# Altium PCB PCB1.PcbDoc
Units mil, origin at the board's own origin, x right, y up, seen from the top; angles counter-clockwise.
Board outline 1980 x 1920 mil, 2 copper layers (Top Layer, Bottom Layer); 32 components, 21 nets, 80 pads, 22 vias.
Unrouted connection lines stored in the file: 1.
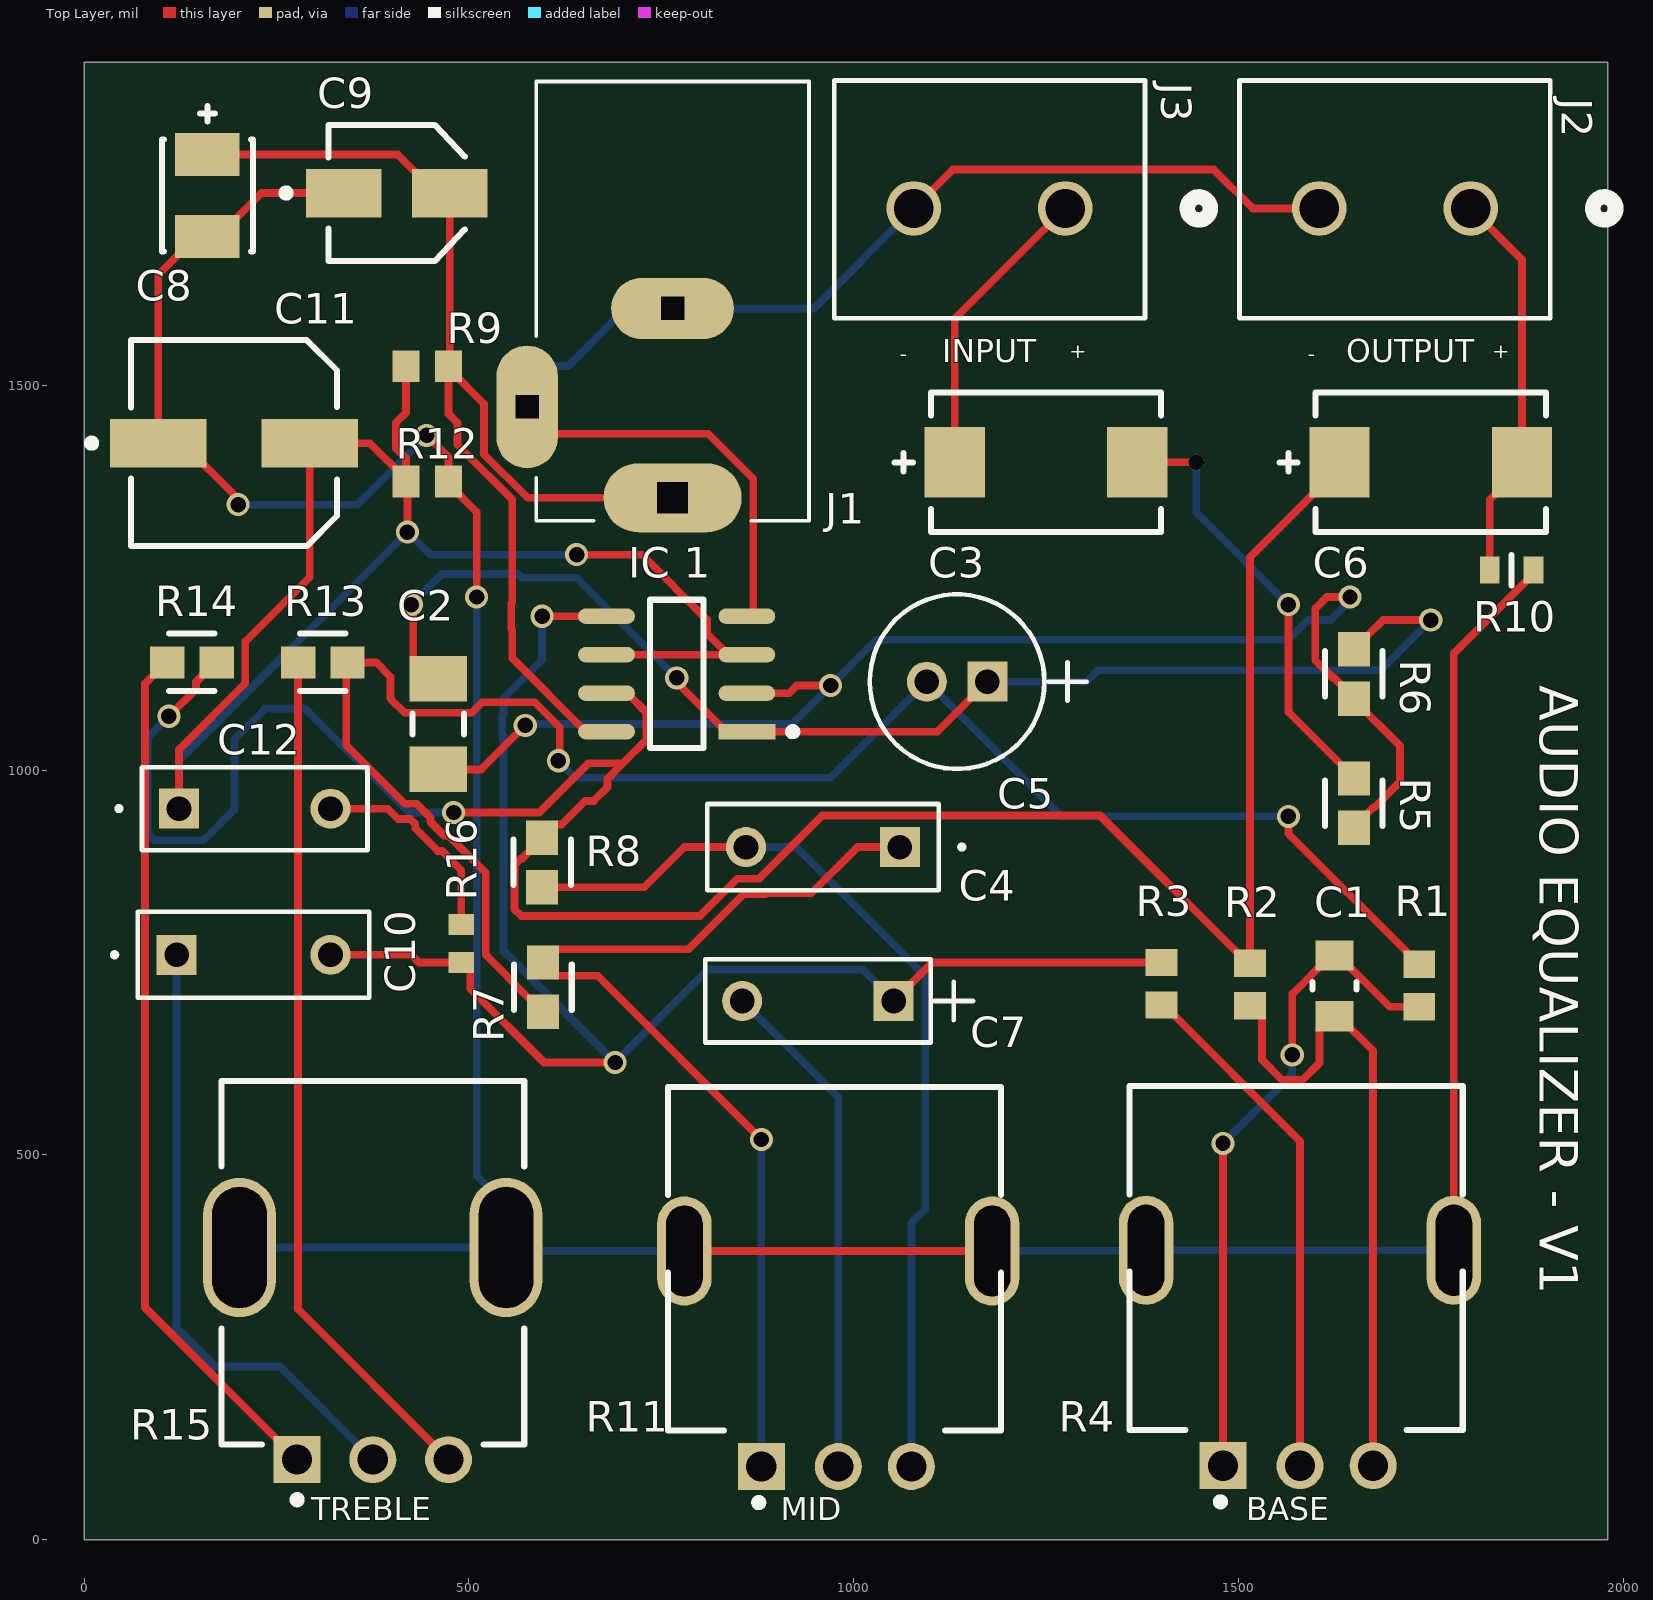
[diagram p0: Top Layer view]
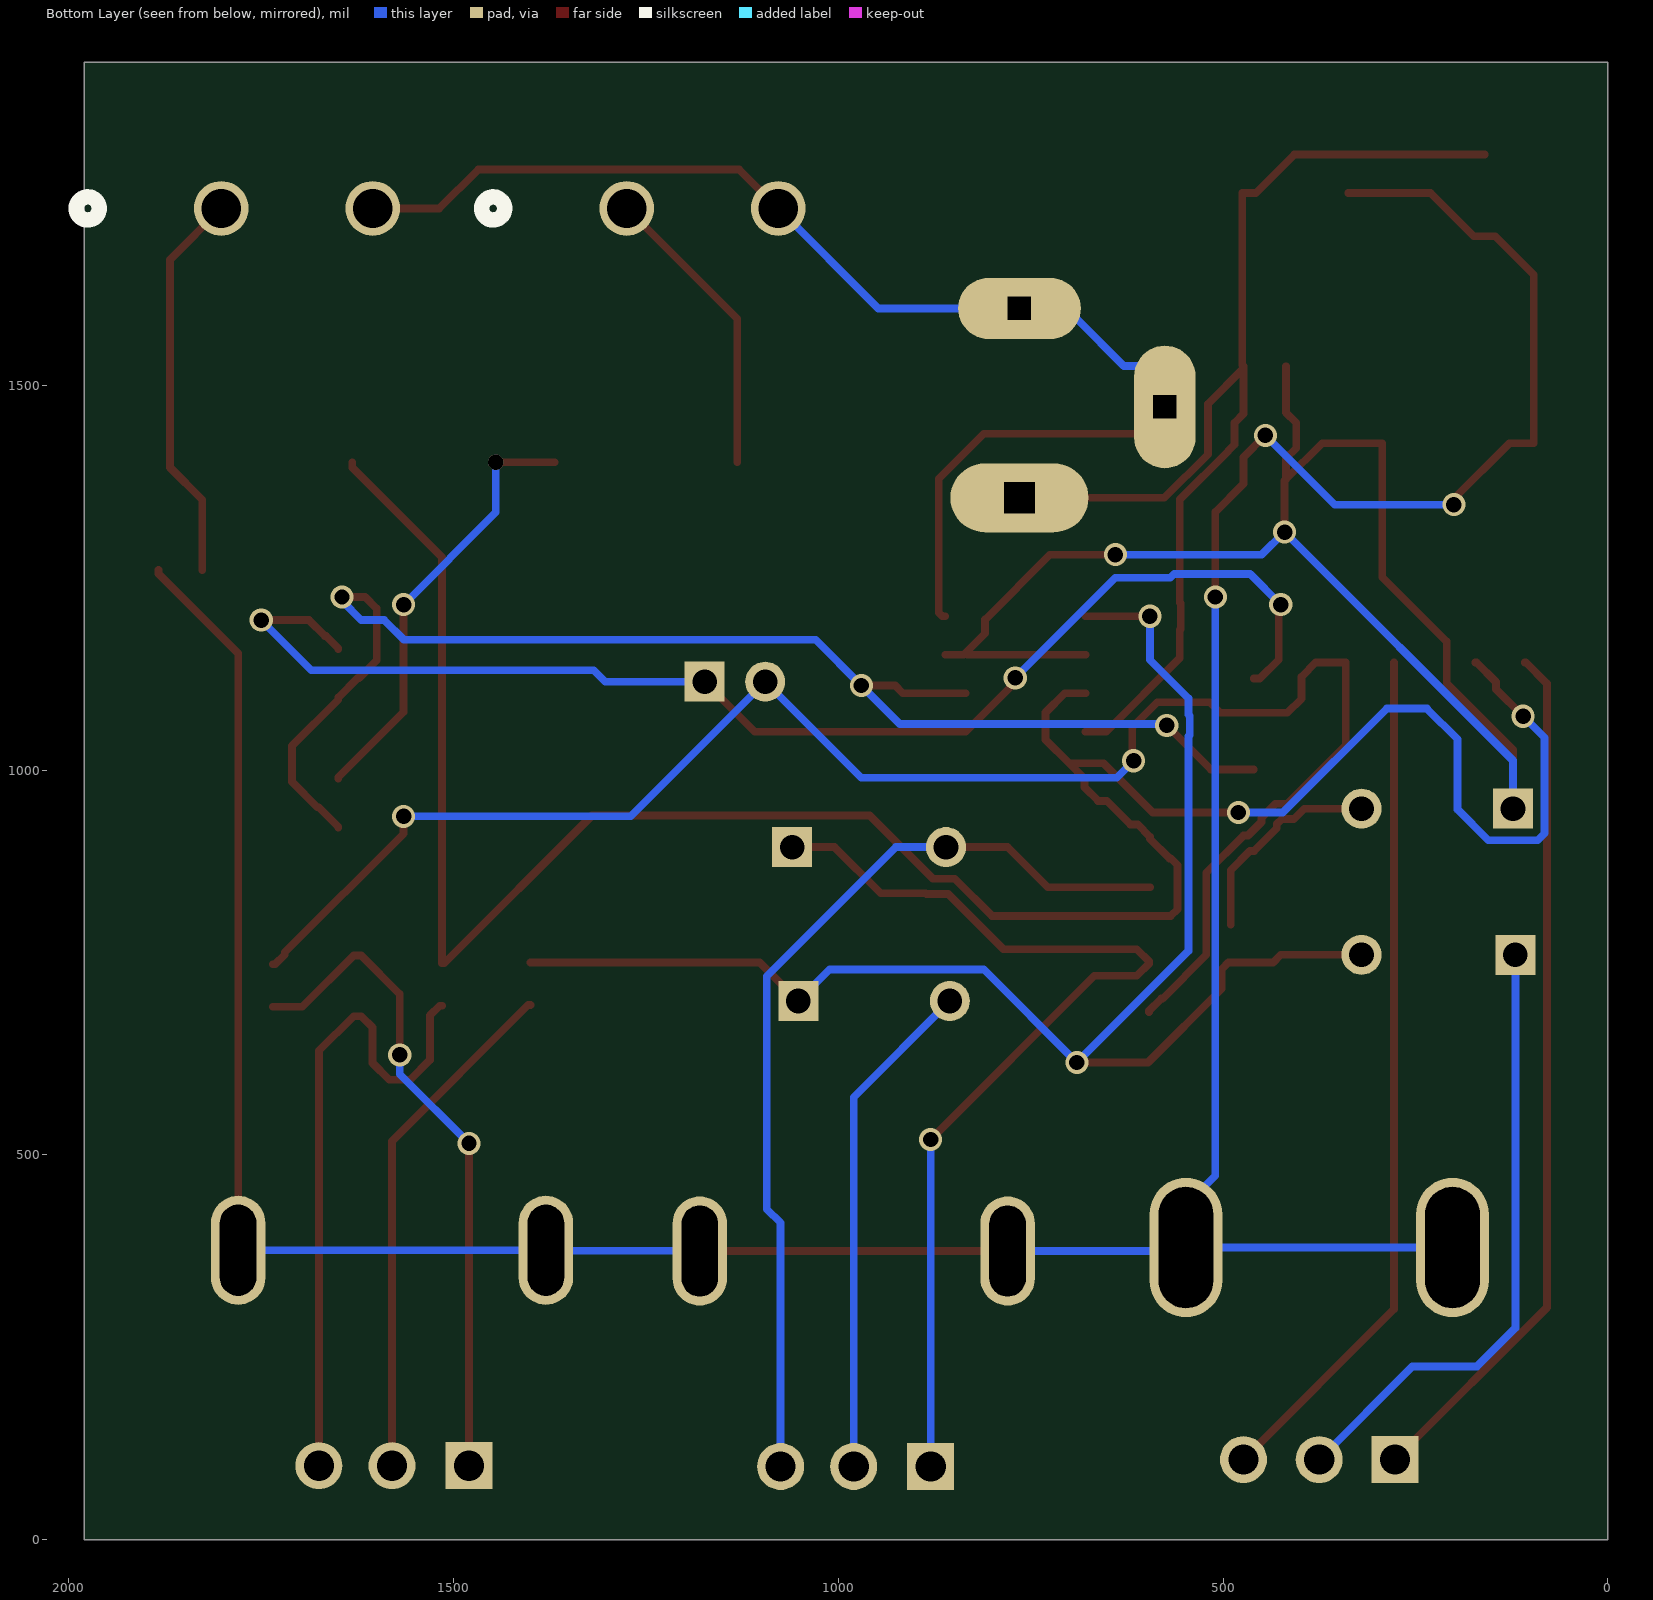
[diagram p1: Bottom Layer view, seen from below]
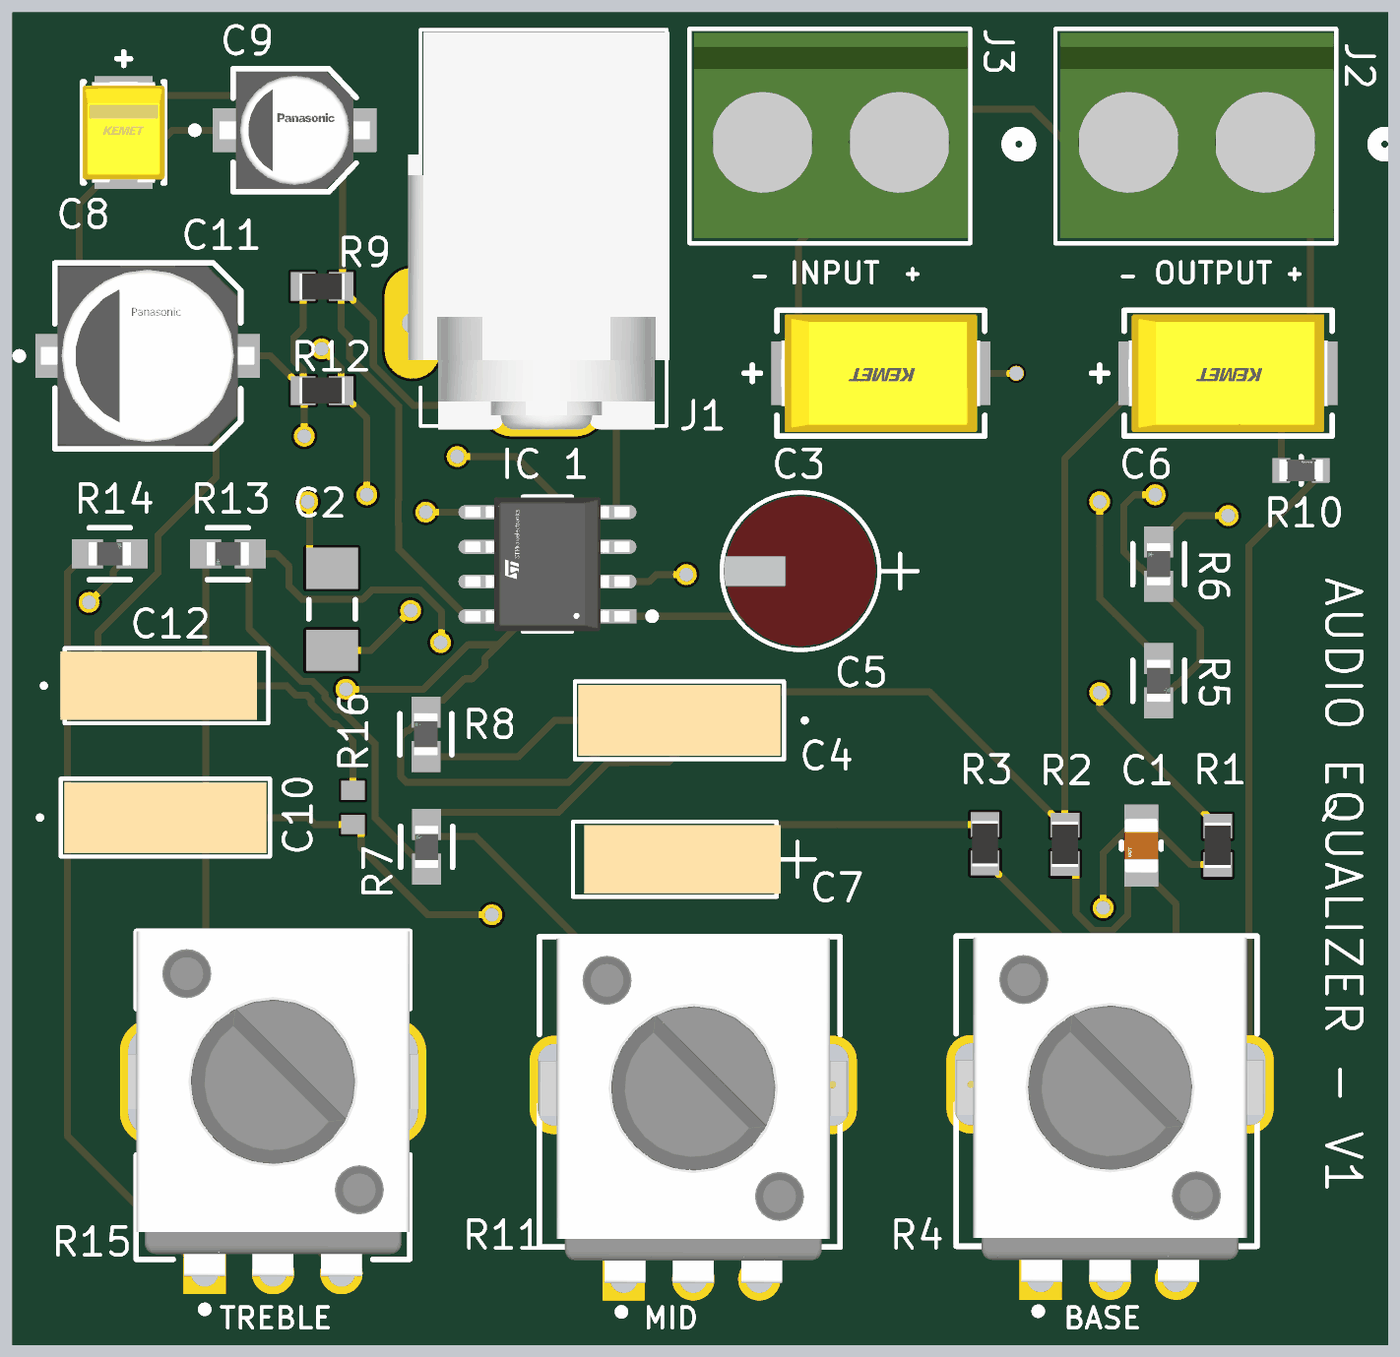
[diagram p2: 3D render of the assembled board from above, using the file's embedded part models]

## Layer stack, top to bottom
Top Solder: solder mask 0.4, Solder Resist, Dk 3.5
Top Layer: signal copper 1.4
Dielectric 1: dielectric 12.6, FR-4, Dk 4.8
Bottom Layer: signal copper 1.4
Bottom Solder: solder mask 0.4, Solder Resist, Dk 3.5

## Board outline
0,0 0,1920 1980,1920 1980,0

## Design rules (kind name [scope] priority, off if disabled: settings)
Clearance [All] p1: gap=10 ignorepadtopadclearanceinfootprint=FALSE
HoleSize [All] p1: absolutevalues=TRUE maxlimit=700 minlimit=1 maxpercent=80.000 minpercent=20.000
PolygonConnect [All] p1: connectstyle=Relief reliefconductorwidth=10 reliefentries=4 polygonreliefangle="90 Angle" airgapwidth=10
RoutingVias [All] p1: holewidth=28 width=50 viastyle="Through Hole" minholewidth=5 minwidth=1 maxholewidth=50 maxwidth=50
SolderMaskExpansion [All] p1: expansion=4 istentingtop=FALSE
Width [All] p1: maxlimit=10 minlimit=10 preferedwidth=10
29 further rules are at their usual default settings.

## Components (designator, comment, footprint, x,y, rotation, side; value= is the part's Value field where it differs from the comment)
C1 "47nF" FP-0805-L_2_01_0_2-W_1_25-MFG 1625,719.68 r270 top
C2 "33pF" CAPC3216X94X50ML20T25 460,1060 r90 top
C3 "10uF 25v" FP-T491D-MFG 1250,1400 r180 top
C4 "4.7nF 63v" CAP_R82E-7P4X2P6-5P0_KEM 1060,900 r180 top
C5 "2.2u 63v" CAP_WCAP-ATG8_5x11_WRE 1173.74,1115 r180 top
C6 "10uf 25v" FP-T491D-MFG 1750,1400 r180 top
C7 "22n 63v" CAP_R82_2.5X6.5X7.2_ATN 1052,700 r180 top
C8 "0.1uF 35v" FP-T491B105K035AT-MFG 160,1746.85 r90 top
C9 "10uF 35v" FP-FKB-MFG 406.1,1750 r0 top
C10 "4.7nF 63v" CAP_R82E-7P4X2P6-5P0_KEM 120,760 r0 top
C11 "100uF 35v" FP-FTD-MFG 194.64,1425 r0 top
C12 "1.2n 100v" CAP_PHE_426_DJ_4100-5150_KEM 123.15,950 r0 top
"IC 1" "TL072CD" FP-SO8-IPC_C 770,1125 r180 top
J1 "RAPC732X" SWITCHCRAFT_RAPC732X 764.56,1600 r180 top (schematic designator J?)
J2 "691137710002" CONN2_710002_WRE 1801.85,1730 r180 top
J3 "691137710002" CONN2_710002_WRE 1275,1730 r180 top
R1 "10k" RESC1609X50X30ML8T20 1735,720 r270 top
R2 "10k" RESC1609X50X30ML8T20 1515,721.5 r90 top
R3 "10k" RESC1609X50X30ML8T20 1400,722.44 r90 top
R4 "P0915N-FC15BR100K" BI_Technologies_0_MFG 1575,366 r0 top
R5 "47k" FP-CRCW0603-e3-IPC_A 1650,957.1 r270 top
R6 "47k" FP-CRCW0603-e3-IPC_A 1650,1125 r90 top
R7 "3.3k" FP-CRCW0603-e3-IPC_A 596.16,717.9 r90 top
R8 "3.3k" FP-CRCW0603-e3-IPC_A 595,880 r90 top
R9 "10k" RESC1609X50X30ML8T20 445.79,1525 r0 top
R10 "22k" FP-ERA3A-MFG 1855,1260 r0 top
R11 "P0915N-FC15BR100K" BI_Technologies_0_MFG 975,365 r0 top
R12 "10k" RESC1609X50X30ML8T20 445.79,1375 r180 top
R13 "1.8k" FP-CRCW0603-e3-IPC_A 310,1140 r180 top
R14 "1.8k" FP-CRCW0603-e3-IPC_A 140,1140 r0 top
R15 "PTV09A-4020F-A504" Bourns_0_MFG 375,379.59 r0 top
R16 "270" RESC1608X55X30LL15T15 490,774.61 r270 top

## Footprints (in the part's own frame and the unit in brackets; to place one, negate y for a bottom-side part, rotate by r counter-clockwise, add the part's x,y. Pads: shape width x height; smd on the part's side, far side on the other; paste and mask are expansions set on the pad)
BI_Technologies_0_MFG [mm]
  rect 1.55x1.55 hole 1 paste-2539.97 mask+0: 1(-2.413,-6.858)
  round 1.55 hole 1 paste-2539.97 mask+0: 2(0.127,-6.858) 3(2.54,-6.858)
  rrect100% 1.8x3.6 hole 1.2 slot 3 at 90 deg paste-2539.97 mask+0: 4(-4.953,0.254) 5(5.207,0.254)
  silkscreen extent -5.5,-8.17 5.5,5.68, body extent -5.57,-7.75 5.83,5.73, height 0.25
Bourns_0_MFG [mm]
  rect 1.55x1.55 hole 1 paste-2539.97 mask+0: 1(-2.5,-7)
  round 1.55 hole 1 paste-2539.97 mask+0: 2(0,-7) 3(2.5,-7)
  rrect100% 2.4x4.6 hole 4 slot 1.8 at 0 deg paste-2539.97 mask+0: 4(-4.4,0) 5(4.4,0)
  silkscreen extent -5,-8.45 5,5.5, body extent -5.7,-7.88 5.7,5.6, height 0.25
CAP_PHE_426_DJ_4100-5150_KEM [mil]
  rect 52x52 / inner round 60 / far side rect 52x52 hole 32 paste-99999 mask+0: 1(0,0)
  round 52 / inner round 60 / far side round 52 hole 32 paste-99999 mask+0: 2(196.85,0)
  silkscreen extent -81,-54 245,54, body extent -54,-49 229,49, height 256
CAP_R82_2.5X6.5X7.2_ATN [mil]
  rect 52x52 / inner round 60 / far side rect 52x52 hole 32 paste-99999 mask+0: 1(0,0)
  round 52 / inner round 60 / far side round 52 hole 32 paste-99999 mask+0: 2(197,0)
  silkscreen extent -103,-54 245,54, body extent -54,-49 229,49, height 256
CAP_R82E-7P4X2P6-5P0_KEM [mil]
  rect 52x52 / inner round 60 / far side rect 52x52 hole 32 paste-99999 mask+0: 1(0,0)
  round 52 / inner round 60 / far side round 52 hole 32 paste-99999 mask+0: 2(200,0)
  silkscreen extent -84,-56 250,56, body extent -46,-51 246,51, height 260
CAP_WCAP-ATG8_5x11_WRE [mil]
  rect 52x52 / inner round 60 / far side rect 52x52 hole 32 paste-99999 mask+0: 1(0,0)
  round 52 / inner round 60 / far side round 52 hole 32 paste-99999 mask+0: 2(78.74,0)
  silkscreen extent -129,-113 153,113, body extent -69,-108 149,108, height 483
CAPC3216X94X50ML20T25 [mm] "Chip Capacitor, 2-Leads, Body 3.20x1.60mm, IPC Low Density"
  rect 1.5x1.9 smd: 1(-1.5,0) 2(1.5,0)
  silkscreen extent -0.35,-0.85 0.35,0.85, body extent -1.7,-0.9 1.7,0.9, height 0.94
CONN2_710002_WRE [mil]
  round 71 / inner round 60 / far side round 71 hole 51 paste-99999 mask+0: 1(0,0) 2(196.85,0)
  silkscreen extent -189,-166 300,143, body extent -100,-160 294,135, height 453
FP-0805-L_2_01_0_2-W_1_25-MFG [mm]
  rect 1x1.25 smd paste+0 mask+0: 1(-1,0) 2(1,0)
  silkscreen extent -0.13,-0.72 0.13,0.72, body extent -1.6,-0.82 1.6,0.82, height 0.25
FP-CRCW0603-e3-IPC_A [mil]
  rect 44.69x41.82 smd paste+0 mask+0: 1(-32.1,0) 2(32.1,0)
  silkscreen extent -30,-37 30,37, body extent -74,-41 74,41, height 10
FP-ERA3A-MFG [mm]
  rect 0.65x0.9 smd paste+0 mask+0: 1(-0.725,0) 2(0.725,0)
  silkscreen extent 0,-0.5 0,0.5, body extent -1.15,-0.6 1.15,0.6, height 0.25
FP-FKB-MFG [mm]
  rect 2.5x1.6 smd paste+0 mask+0: 1(-1.75,0) 2(1.75,0)
  silkscreen extent -3.77,-2.25 2.25,2.25, body extent -3.25,-2.5 3.25,2.5, height 0.25
FP-FTD-MFG [mm]
  rect 3.2x1.6 smd paste+0 mask+0: 1(-2.5,0) 2(2.5,0)
  silkscreen extent -4.82,-3.4 3.4,3.4, body extent -4.35,-3.65 4.35,3.65, height 0.25
FP-SO8-IPC_C [mil]
  rect 73.78x20.16 smd paste+0 mask+0: 1(-91.18,75)
  rrect100% 73.78x20.16 smd paste+0 mask+0: 2(-91.18,25) 3(-91.18,-25) 4(-91.18,-75) 5(91.18,-75) 6(91.18,-25) 7(91.18,25) 8(91.18,75)
  silkscreen extent -156,-96 35,96, body extent -132,-100 132,100, height 10
FP-T491B105K035AT-MFG [mm]
  rect 1.42x2.13 smd paste+0 mask+0: 1(-1.35,0) 2(1.35,0)
  silkscreen extent -1.85,-1.5 2.95,1.5, body extent -2.18,-1.62 2.18,1.62, height 0.25
FP-T491D-MFG [mm]
  rect 1.99x2.33 smd paste+0 mask+0: 1(-3.01,0) 2(3.01,0)
  silkscreen extent -3.8,-2.3 5,2.3, body extent -4.13,-2.42 4.13,2.42, height 0.25
RESC1608X55X30LL15T15 [mm] "Chip Resistor, 2-Leads, Body 1.60x0.80mm, IPC High Density"
  rect 0.7x0.85 smd: 1(-0.625,0) 2(0.625,0)
  body extent -0.87,-0.48 0.87,0.48, height 0.55
RESC1609X50X30ML8T20 [mm] "Chip Resistor, 2-Leads, Body 1.65x0.95mm, IPC Low Density"
  rect 0.9x1.05 smd: 1(-0.7,0) 2(0.7,0)
  body extent -0.82,-0.48 0.82,0.48, height 0.5
SWITCHCRAFT_RAPC732X [mm]
  oval 4.56x2.28 hole 1.02 square: PIN(0,6.25)
  oval 2.025x4.05 hole 0.76 square: SHUNT(4.8,3.25)
  oval 4.05x2.025 hole 0.76 square: SLEEVE(0,0)
  silkscreen extent -4.5,-7.49 4.5,7.01, body extent -4.6,-7.4 4.95,7.14, height 10.73

## Part data
C1: library part CMP-04427-003357-1, "General Purpose Ceramic Capacitor, 0805, 47nF, 10%, X8R, 15%, 50V", Case Code (Imperial)=0805, Case Code (Metric)=2012, Dielectric=X8R, Dielectric Material=Ceramic, Max Operating Temperature=150°C, Min Operating Temperature=-55°C, Tolerance=10%, Voltage=50V, Capacitance=47nF, Case/Package=0805, Construction=Flat, Depth=1.25mm, Height=0.94mm, Length=2.01mm, Mount="Surface Mount", Number of Pins=2, Packaging="Tape and Reel", Radiation Hardening=No, REACH SVHC="No SVHC", RoHS Compliant=Yes, Series=FlEXITERM, Termination=SMD/SMT, Voltage Rating=50V, Voltage Rating (DC)=50V
C2: library part CMP-1037-01149-2, "Chip Capacitor, 33 pF, +/- 5%, 100 V, -55 to 125 degC, 1206 (3216 Metric), RoHS, Tape and Reel", Case Size/Dimension=1206, Dielectric=C0G/NP0, Manufacturer=AVX, Package Description="2-Pin Surface Mount Device, Body 3.2 x 1.6 mm", Rated Voltage=100V, Tolerance (%)=±5%, Capacitance=33pF, Datasheet URL=http://datasheets.avx.com/C0GNP0-Dielectric.pdf, Datasheet Version=04/2016, Manufacturer URL=http://www.avx.com/, Mounting Technology=SurfaceMount, Package Reference=1206
C3 C6: library part CMP-2000-07200-2, "CAP TANT 10UF 10% 25V 2917", Capacitance=10uF, Case Code (Imperial)=2917, Case Code (Metric)=7343, Dielectric Material=Tantalum, ESR (Equivalent Series Resistance)=1R, Leakage Current=2.5uA, Max Operating Temperature=125°C, Min Operating Temperature=-55°C, Package Quantity=1, Ripple Current=387mA, Tolerance=20%, Voltage=25V, Case/Package=2917, Depth=4.3mm, Dissipation Factor=6%, Features="General Purpose", Height=2.8mm, Height - Seated (Max)=0.122inch, Lead Free="Lead Free", Length=7.3mm, Life (Hours)=2000Hour, Mount="Surface Mount", Number of Pins=2, Packaging="Tape and Reel", Polarity=Polar, Radiation Hardening=No, REACH SVHC="No SVHC", Termination=SMD/SMT, Voltage Rating=25V, Voltage Rating (DC)=25V, Width=4.3mm
C4 C10: library part R82EC1470DQ50K, "No Description Available", Mfr_Name=Kemet, Type="Film Capacitor"
C5: library part 860010772006, "No Description Available", Mfr_Name="Wurth Electronics"
C7: library part R82EC2220DQ50J, "No Description Available", Mfr_Name="Kemet / Arcotronics"
C8: library part CMP-03017-000043-1, "CAP TANT 1UF 10% 35V 1411", Capacitance=1uF, Case Code (Imperial)=1411, Case Code (Metric)=3528, Dielectric Material=Tantalum, ESR (Equivalent Series Resistance)=5R, Leakage Current=500nA, Max Operating Temperature=125°C, Min Operating Temperature=-55°C, Package Quantity=1, Ripple Current=130mA, Tolerance=20%, Voltage=35V, Case/Package=1411, Depth=2.8mm, Dissipation Factor=4%, Features="General Purpose", Height=1.9mm, Height - Seated (Max)=0.083inch, Lead Free="Lead Free", Length=3.5mm, Life (Hours)=2000Hour, Mount="Surface Mount", Number of Pins=2, Packaging="Tape and Reel", Polarity=Polar, Radiation Hardening=No, REACH SVHC="No SVHC", Termination=SMD/SMT, Voltage Rating=35V, Voltage Rating (DC)=35V, Width=2.8mm
C9: library part CMP-2000-06211-2, "CAP ALUM 10UF 20% 35V SMD", Capacitance=10uF, Case/Package=Radial, ESR (Equivalent Series Resistance)=1.35R, Leakage Current=3uA, Max Operating Temperature=105°C, Min Operating Temperature=-55°C, Package Quantity=1, Ripple Current=90mA, Tolerance=20%, Voltage=35V, Construction=Cylindrical, Contact Plating=Tin, Diameter=4mm, Height=5.8mm, Height - Seated (Max)=0.24inch, Impedance=1.35R, Lead Free="Lead Free", Length=5.8mm, Life (Hours)=2000Hour, Material=Aluminium, Mount="Surface Mount", Number of Pins=2, Packaging="Tape and Reel", Polarity=Polar, Radiation Hardening=No, REACH SVHC="No SVHC", Ripple Current (AC)=90mA, RoHS Compliant=Yes, Series=FK, Termination=SMD/SMT, Voltage Rating=35V, Voltage Rating (DC)=35V, Width=5.5mm
C11: library part CMP-05427-000027-1, "CAP ALUM 100UF 20% 35V SMD", Capacitance=100uF, Case/Package=Radial, ESR (Equivalent Series Resistance)=260mR, Leakage Current=35uA, Max Operating Temperature=105°C, Min Operating Temperature=-55°C, Package Quantity=1000, Ripple Current=300mA, Tolerance=20%, Voltage=35V, Construction=Cylindrical, Contact Plating=Tin, Diameter=6.3mm, Height=5.8mm, Height - Seated (Max)=0.24inch, Lead Diameter=0.65mm, Lead Pitch=1.8mm, Length=5.8mm, Life (Hours)=2000Hour, Mount="Surface Mount", Number of Pins=2, Packaging="Tape and Reel", Polarity=Polar, Radiation Hardening=No, REACH SVHC="No SVHC", Ripple Current (AC)=300mA, RoHS Compliant=Yes, Series=FT, Termination=SMD/SMT, Voltage Rating=35V, Voltage Rating (DC)=35V
C12: library part PHE426DJ4120JR05, "No Description Available", Mfr_Name=Kemet
"IC 1": library part CMP-12131-000015-1, "IC OPAMP JFET 2 CIRCUIT 8SO", Case/Package=SO, Dual Supply Voltage=15V, Input Bias Current=200pA, Input Offset Voltage (Vos)=10mV, Input Offset Voltage-Max=3mV, Max Dual Supply Voltage=18V, Max Operating Temperature=70°C, Max Supply Voltage=36V, Min Dual Supply Voltage=3V, Min Input Voltage=-12V, Min Operating Temperature=0°C, Nominal Supply Current=2.5mA, Operating Supply Current=1.4mA, Output Current=40mA, Package Quantity=100, Voltage Gain=106.02dB, Amplifier Type="LOW NOISE", Common Mode Rejection Ratio=70dB, Gain Bandwidth Product=4MHz, Height=1.25mm, Lead Free="Lead Free", Length=5mm, Max Input Voltage=15V, Mount="Surface Mount", Number of Amplifiers=2, Number of Channels=2, Number of Circuits=2, Number of Elements=2, Number of Pins=8, Operating Supply Voltage=18V, Output Current per Channel=40mA, Packaging=Rail/Tube, Radiation Hardening=No, REACH SVHC="No SVHC", RoHS Compliant=Yes, Series=-, Slew Rate=16V/µs, Slew Rate-Nom=13V/µs, Supply Current=2.5mA, Technology=BIFET, Unity Gain Bandwidth Product=4MHz, Width=4mm
J1: "Power Barrel Connector Jack 2.50mm ID (0.098\"), 5.50mm OD (0.217\") Through Hole, Right Angle", Package=None, Availability=Unavailable, MP=RAPC732X, Price=None
J2 J3: "No Description Available", Mfr_Name="Wurth Electronics", RefDes=RefDes, Type=Type
R1 R2 R3 R9 R12: library part CMP-1666-00005-4, "Chip Resistor, 10 KOhm, +/- 1%, 100 mW, -55 to 155 degC, 0603 (1608 Metric), RoHS, Tape and Reel", Manufacturer="Vishay Semiconductor", Max Operating Temperature="155 degC", Min Operating Temperature="-55 degC", Package Quantity=5000, Voltage Rating="75 V", ComponentLink1Description="Manufacturer URL", ComponentLink1URL=http://www.vishay.com/, ComponentLink2Description=Datasheet, ComponentLink2URL=https://datasheet.ciiva.com/11809/0900766b80d98afc-11809037.pdf, DatasheetVersion=06/2012, Height="0.45 mm", Length="1.55 mm", Mounting Technology="Surface Mount", PackageDescription="2-Pin Surface Mount Device, Body 1.575 x 0.85 mm", PackageReference=0603, Packaging="Tape and Reel", REACH SVHC=Unknown, RoHSCompliant=true
R5 R6: library part CMP-2000-03379-3, "RES SMD 47K OHM 1% 1/10W 0603", Case Code (Imperial)=0603, Case Code (Metric)=1608, Max Operating Temperature=155°C, Max Power Dissipation=100mW, Min Operating Temperature=-55°C, Package Quantity=5000, Resistance=47kR, Resistance Tolerance=1%, Resistor Type="Thick Film", Temperature Coefficient=100ppm/°C, Voltage Rating=75V, Case/Package=0603, Construction=Rectangular, Contact Plating=Tin, Depth=0.85mm, Features="Automotive AEC-Q200", Height=0.45mm, Lead Free="Lead Free", Length=1.55mm, Military Standard=Not, Mount="Surface Mount", Number of Terminations=2, Packaging="Tape and Reel", Power Rating=100mW, Radiation Hardening=No, RoHS Compliant=Yes, Series=CRCW, Size Code=0603, Technology="THICK FILM", Termination=SMD/SMT, Tolerance=1%, Voltage Rating (DC)=75V, Weight=7.1E-05oz, Width=0.85mm
R7 R8: library part CMP-2100-03614-2, "RES Thick Film, 3.3kΩ, 1%, 0.1W, 100ppm/°C, 0603", Case Code (Imperial)=0603, Case Code (Metric)=1608, Max Operating Temperature=155°C, Max Power Dissipation=100mW, Min Operating Temperature=-55°C, Package Quantity=10, Resistance=3.3kR, Temperature Coefficient=100ppm/°C, Tolerance=1%, Voltage Rating=75V, Case/Package=0603, Composition="Thick Film", Contact Plating=Tin, Depth=0.85mm, Features="Automotive AEC-Q200", Height=0.45mm, Lead Free="Lead Free", Length=1.55mm, Military Standard=Not, Mount="Surface Mount", Number of Terminations=2, Packaging="Tape and Reel", Power Rating=100mW, Radiation Hardening=No, Termination=SMD/SMT, Voltage Rating (DC)=75V, Weight=7.1E-05oz, Width=0.85mm, Working Voltage=75V
R10: library part CMP-2000-00956-2, "RES SMD 22K OHM 0.1% 1/10W 0603", Case Code (Imperial)=0603, Case Code (Metric)=1608, Max Operating Temperature=155°C, Max Power Dissipation=100mW, Min Operating Temperature=-55°C, Package Quantity=1, Resistance=22kR, Resistance Tolerance=0.1%, Resistor Type="Thin Film", Temperature Coefficient=25ppm/°C, Voltage Rating=75V, Case/Package=0603, Construction=Rectangular, Contact Plating=Tin, Depth=0.8mm, Features="Automotive AEC-Q200", Height=0.45mm, Lead Free="Lead Free", Length=1.6mm, Military Standard=Not, Mount="Surface Mount", Number of Pins=2, Number of Terminations=2, Packaging="Tape and Reel", Power Rating=100mW, Radiation Hardening=No, REACH SVHC="No SVHC", RoHS Compliant=Yes, Series=ERA-3A, Size Code=0603, Technology="THIN FILM", Termination=Solder, Tolerance=0.1%, Voltage Rating (DC)=75V, Width=0.8mm
R13 R14: library part CMP-02407-005782-1, "RES Thick Film, 1.8kΩ, 1%, 0.1W, 100ppm/°C, 0603", Case Code (Imperial)=0603, Case Code (Metric)=1608, Max Operating Temperature=155°C, Max Power Dissipation=100mW, Min Operating Temperature=-55°C, Package Quantity=5000, Resistance=1.8kR, Temperature Coefficient=100ppm/°C, Tolerance=1%, Voltage Rating=75V, Case/Package=0603, Composition="Thick Film", Contact Plating=Tin, Depth=0.85mm, Features="Automotive AEC-Q200", Height=0.45mm, Lead Free="Lead Free", Length=1.55mm, Military Standard=Not, Number of Terminations=2, Packaging="Tape and Reel", Power Rating=100mW, Radiation Hardening=No, Termination=SMD/SMT, Voltage Rating (DC)=75V, Weight=7.1E-05oz, Width=0.033inch
R16: library part CMP-2000-00388-1, Manufacturer=Panasonic, Part Number=ERJ3EKF2700V

## Via types
v1: diameter 30, hole 20, Top Layer to Bottom Layer, 21 vias
v2: diameter 20, hole 20, Top Layer to Bottom Layer, 1 vias

## Nets (pads, with @x,y where several pads share a name; then routed paths per layer and width w, separated by ;. In a path a pad name is that pad's centre, name@x,y a point inside that pad or via, vN(x,y) a via of type N, cw(c..) or ccw(c..) an arc to the next point about the centre after c; other vN are vias at no path point)
+12: "IC 1.8" C8.2 C9.2 J1.PIN R9.2 | length 1537.3
  Top Layer w10: C8.2 407.28,1800 457.28,1750 C9.2 475,1526.65 R9.2 R9.2@473.35,1522.05 ; 678.82,1050 652.01,1050 556.25,1145.76 556.25,1182.18 555,1183.43 555,1216.57 556.25,1217.82 556.25,1351.7 493.35,1414.6 493.35,1414.93 485,1423.28 485,1451.57 473.35,1463.22 R9.2@473.35,1522.05 ; J1.PIN 576.25,1353.94 519.47,1410.72 519.47,1475.93 R9.2@473.35,1522.05
GND: "IC 1.4" C8.1 C9.1 C11.1 J1.SHUNT J1.SLEEVE J2.2 J3.2 R4.4 R4.5 R10.2 R11.4 R11.5 R12.1 R15.4 R15.5 | length 6296.3
  Top Layer w10: v1(200,1345) 200,1352.71 127.71,1425 C11.1 96.22,1643.89 146.02,1693.7 C8.1 173.98,1693.7 230.28,1750 C9.1 ; v1(445,1435) 473.35,1406.65 R12.1 473.35,1372.05 510,1335.4 v1(510,1225) ; R15.5 R15.5@552.82,375 ; J1.SHUNT 575.59,1469.39 607.79,1437.18 810.88,1437.18 869.33,1378.74 869.33,1204.69 864.63,1200 861.18,1200 ; R11.4 R11.5 ; J3.2 1128.65,1780.5 1468.08,1780.5 1518.58,1730 J2.2 ; R4.5 1780,1151.54 1883.54,1255.08 R10.2
  Bottom Layer w10: v1(200,1345) 355,1345 v1(445,1435) ; R15.4 R15.5 ; v1(510,1225) 510,472.7 548.23,434.47 R15.5 ; J1.SHUNT@607.79,1437.18 575.59,1469.39 J1.SHUNT 575.59,1493.04 607.79,1525.25 628.79,1525.25 690.2,1586.66 751.22,1586.66 J1.SLEEVE 948.15,1600 J3.2 ; R11.4 552.82,375 R15.5 ; R11.5 1180.5,375.5 1379.5,375.5 R4.4 R4.5
INPUT: C3.2 J3.1 | length 389.4
  Top Layer w10: C3.2 1131.5,1586.5 J3.1
NetC1_1: C1.1 R1.2 R4.1 | length 863.6
  Top Layer w10: R4.1 v1(1480,515) ; v1(1570,630) 1570,708.98 1620.08,759.06 C1.1 1629.92,759.06 1696.54,692.44 R1.2
  Bottom Layer w10: v1(1480,515) 1570,605 v1(1570,630)
NetC1_2: C1.2 R2.1 R4.3 | length 853.1
  Top Layer w10: R2.1 1517.95,693.94 1530.67,681.22 1530.67,623.37 1556.54,597.5 1583.46,597.5 1605.39,619.43 1605.39,665.63 1620.08,680.31 C1.2 1629.92,680.31 1675,635.24 R4.3
NetC2_1: "IC 1.2" C2.1 R5.2 R6.1 | length 1829.1
  Top Layer w10: C2.1 515.94,1000.94 v1(573.15,1058.15) ; 834.37,1100 861.18,1100 916.13,1100 926.13,1110 v1(970,1110) ; v1(1645,1225) 1615,1225 1600,1210 1600,1142.64 1622.88,1119.76 1624.57,1119.76 1650,1094.33 R6.1 1650,1091.46 1710,1031.46 1710,984.74 1677.12,951.86 1675.43,951.86 1650,926.44 R5.2
  Bottom Layer w10: v1(573.15,1058.15) 575,1060 920,1060 v1(970,1110) 1029.41,1169.41 1564.41,1169.41 1590,1195 1620,1195 1645,1220 v1(1645,1225)
NetC2_2: "IC 1.1" C2.2 C5.1 R6.2 | length 1721.4
  Top Layer w10: v1(425,1215) 427.6,1212.4 427.6,1143.58 452.13,1119.06 C2.2 ; v1(770,1120) 770,1114.37 834.37,1050 861.18,1050 1108.74,1050 C5.1 ; R6.2 1650,1158.54 1665.91,1174.45 1667.34,1174.45 1687.9,1195 v1(1750,1195)
  Bottom Layer w10: v1(425,1215) 465,1255 563.58,1255 568.58,1250 640,1250 v1(770,1120) ; C5.1 1302.87,1115 1317.87,1130 1685,1130 v1(1750,1195)
NetC3_1: C3.1 R5.1 | length 572.2
  Top Layer w10: C3.1 v2(1445,1400) ; v1(1565,1215) 1565,1075.64 1650,990.64 R5.1
  Bottom Layer w10: v2(1445,1400) 1445,1335 v1(1565,1215)
NetC4_1: C4.1 R7.2 R11.1 | length 1331.8
  Top Layer w10: v1(880,520) 667.34,732.66 612.07,732.66 596.16,748.56 R7.2 596.16,751.44 612.07,767.34 785.33,767.34 856.98,839 885.27,839 886.27,840 945,840 1005,900 C4.1
  Bottom Layer w10: R11.1 v1(880,520)
NetC4_2: C4.2 R8.1 R11.3 | length 1233.8
  Top Layer w10: R8.1 727.9,847.9 780,900 C4.2
  Bottom Layer w10: C4.2 925.21,900 1093,732.21 1093,429.51 1075,411.51 R11.3
NetC5_2: C5.2 R1.1 R7.1 R13.1 | length 2304.8
  Top Layer w10: R7.1 596.16,687.23 580.25,703.14 578.55,703.14 521.73,759.96 521.73,866.55 473.28,915 467.57,915 450,932.57 450,938.28 431.87,956.42 416.39,956.42 340.51,1032.29 340.51,1140 R13.1 379.45,1140 397.92,1121.53 397.92,1093 416.39,1074.53 503.61,1074.53 517.24,1088.15 585.57,1088.15 617.79,1055.94 617.79,1013.72 v1(616.22,1012.15) ; v1(1565,940) 1565,917.56 1719.33,763.23 1719.33,760.28 1732.05,747.56 R1.1
  Bottom Layer w10: v1(616.22,1012.15) 638.37,990 970,990 C5.2 1270,940 v1(1565,940)
NetC6_2: "IC 1.7" C6.2 R2.2 R8.2 R14.2 | length 3283
  Top Layer w10: v1(110,1070) 145.24,1105.24 145.24,1114.57 170.67,1140 R14.2 ; v1(480,945) 591.49,945 655.4,1008.9 700,1008.9 ; 678.82,1100 705.63,1100 730.71,1074.92 730.71,1039.61 700,1008.9 ; C6.2 1631.5,1393.31 1515,1276.81 R2.2 1512.05,749.06 1320.1,941 958.98,941 876.98,859 848.7,859 800.25,810.55 567.88,810.55 559.09,819.34 559.09,876.45 567.88,885.24 569.57,885.24 595,910.67 R8.2 595,913.54 610.91,929.45 620.54,929.45 651.1,960 662.43,960 680,977.57 680,988.9 700,1008.9
  Bottom Layer w10: v1(110,1070) 82.15,1042.15 82.15,917.79 90.94,909 155.36,909 195.18,948.82 195.18,1040.18 235,1080 287.29,1080 422.29,945 v1(480,945)
NetC7_1: "IC 1.5" C7.1 C10.2 R3.2 R16.2 | length 1986.8
  Top Layer w10: C10.2 425,760 435,750 R16.2 492.95,750 501.73,741.22 501.73,715.76 597.49,620 v1(690,620) ; v1(595,1200) 678.82,1200 ; C7.1 1102,750 R3.2
  Bottom Layer w10: v1(595,1200) 595,1143.37 545,1093.37 545,1072.43 543.15,1070.57 543.15,1045.72 545,1043.87 545,765 v1(690,620) 811,741 1011,741 C7.1
NetC7_2: C7.2 R11.2 | length 656.8
  Bottom Layer w10: C7.2 980,575 R11.2
NetC10_1: C10.1 R15.2 | length 810.8
  Bottom Layer w10: C10.1 120,275 170,225 254,225 R15.2
NetC11_2: "IC 1.3" "IC 1.6" C11.2 C12.1 R9.1 R12.2 | length 2071
  Top Layer w10: C12.1 123.15,1026.58 209.45,1112.88 209.45,1167.12 293.07,1250.74 C11.2 371.19,1425 R12.2@418.23,1377.95 ; R9.1 418.23,1464.8 405,1451.57 405,1418.43 418.23,1405.2 R12.2@418.23,1377.95 ; v1(420,1309.33) 420,1376.19 R12.2@418.23,1377.95 ; v1(640,1280) 725,1280 809.29,1195.71 809.29,1177.83 837.12,1150 861.18,1150 ; 678.82,1150 832.43,1150
  Bottom Layer w10: C12.1 123.15,1012.48 v1(420,1309.33) 420.67,1309.33 450,1280 v1(640,1280)
NetC12_2: C12.2 R16.1 | length 277.3
  Top Layer w10: C12.2 394.52,950 408.1,936.42 423.58,936.42 430,930 430,924.29 459.29,895 465,895 490,870 R16.1
NetR3_1: R3.1 R4.2 | length 675.2
  Top Layer w10: R3.1 1402.95,694.88 1580,517.83 R4.2
NetR13_2: R13.2 R15.3 | length 1117
  Top Layer w10: R13.2 277.9,299.53 R15.3
NetR14_1: R14.1 R15.1 | length 1130.6
  Top Layer w10: R14.1 106.46,1140 79,1112.54 79,301.57 R15.1
OUTPUT: C6.1 J2.1 R10.1 | length 515
  Top Layer w10: J2.1 1868.5,1663.35 C6.1 1868.5,1393.31 1826.46,1351.26 R10.1

## Silkscreen, mask and mechanical layers (free items; w line width, h text height)
Top Overlay:
  text "+" at 1280,1535 h20
  text "+" at 1830,1535 h20
  text "-" at 1060,1531.43 h20
  text "-" at 1590,1531.43 h20
  text "INPUT" at 1115,1530 h30
  text "OUTPUT" at 1640,1530 h30
  text "AUDIO EQUALIZER - V1" at 1891.9,1110 h50 r270
  text "TREBLE" at 295,25 h30
  text "MID" at 905,25 h30
  text "BASE" at 1510,25 h30
Mechanical 1:
  lines w2: 0,0 1975,0 1975,1920 0,1920 0,0